# Altium PCB Fuente_Alimentacion.PcbDoc
Units mm, origin at the board's own origin, x right, y up, seen from the top; angles counter-clockwise.
Board outline 62.23 x 53.34 mm, 2 copper layers (Top Layer, Bottom Layer); 45 components, 16 nets, 122 pads, 39 vias.
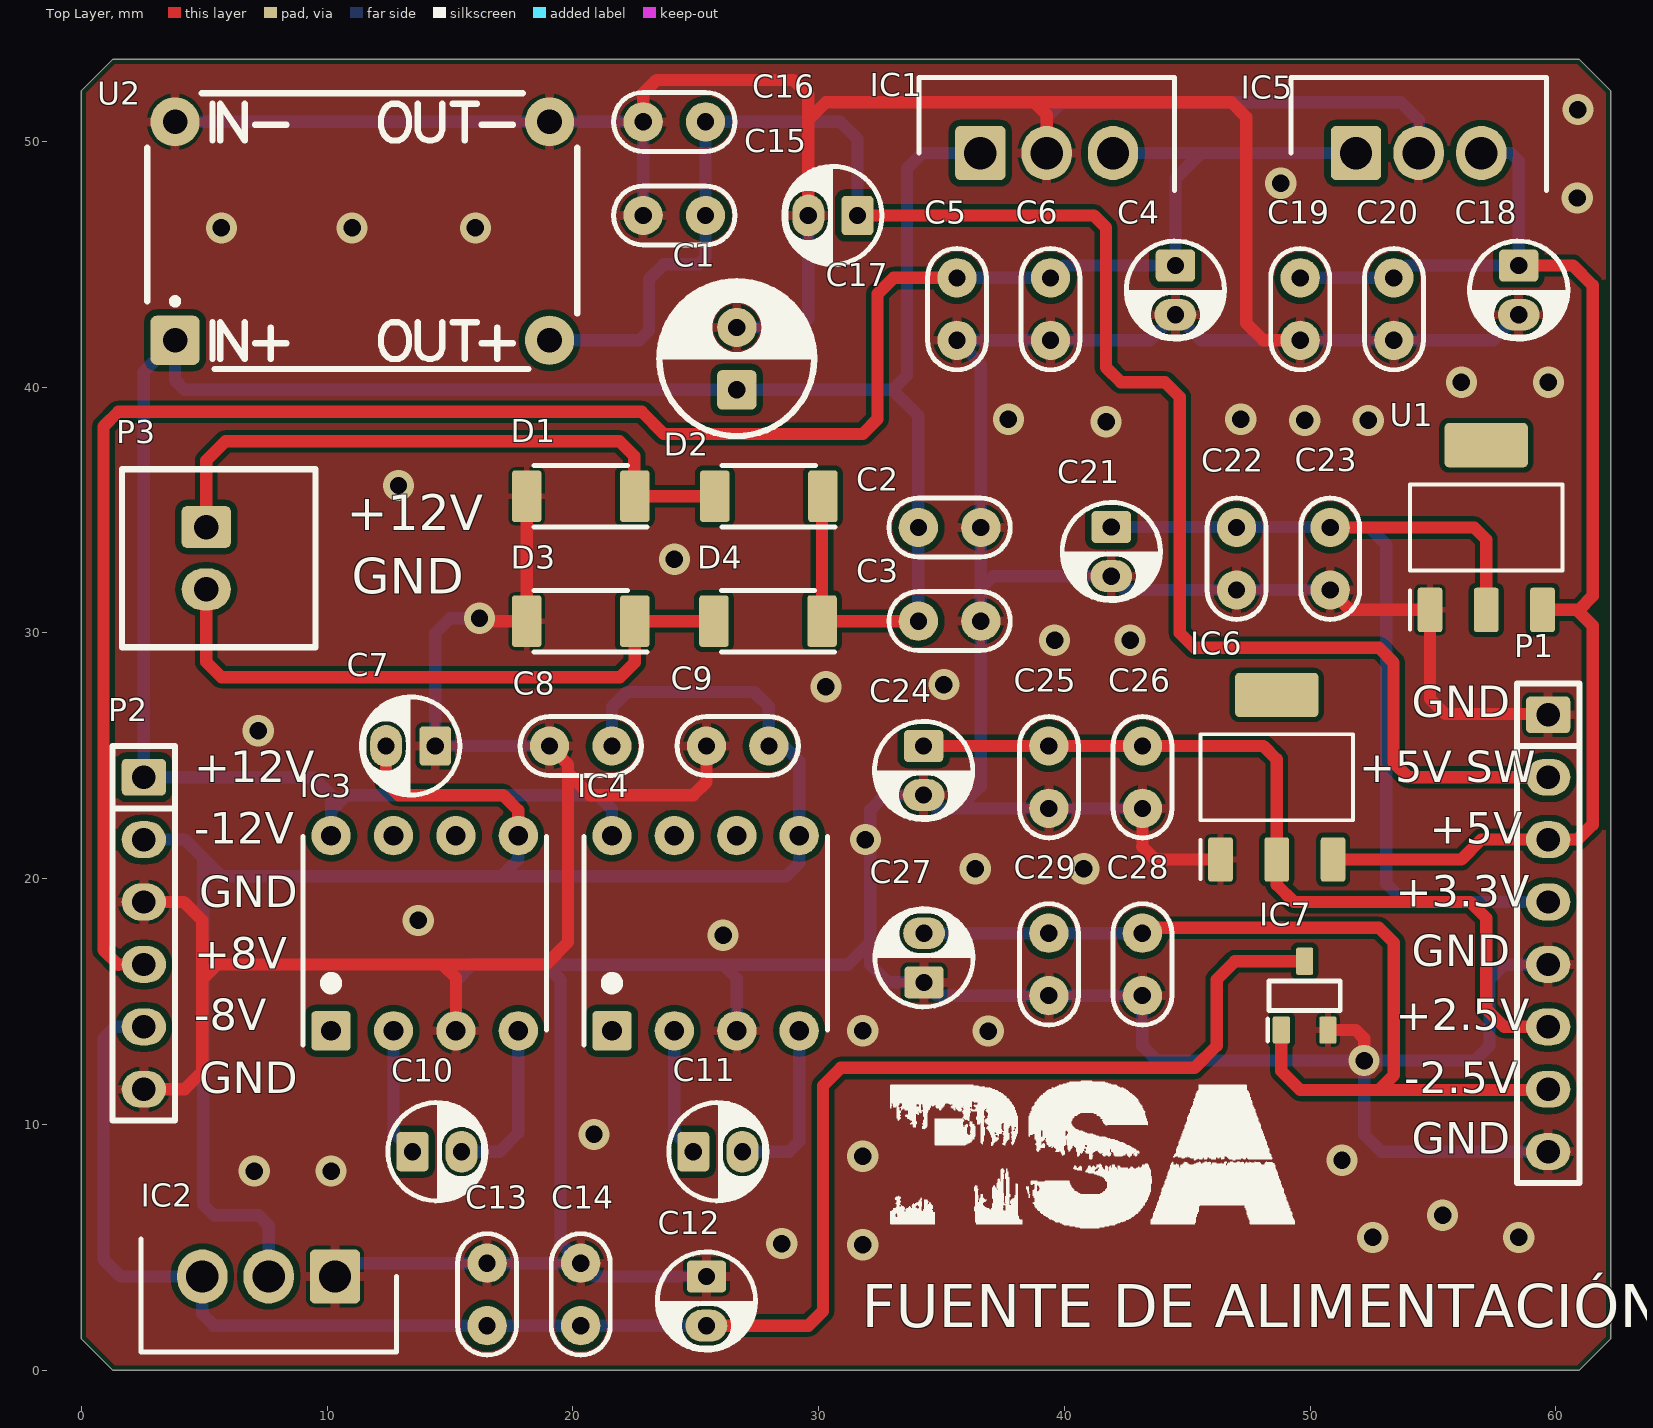
[diagram p0: Top Layer view]
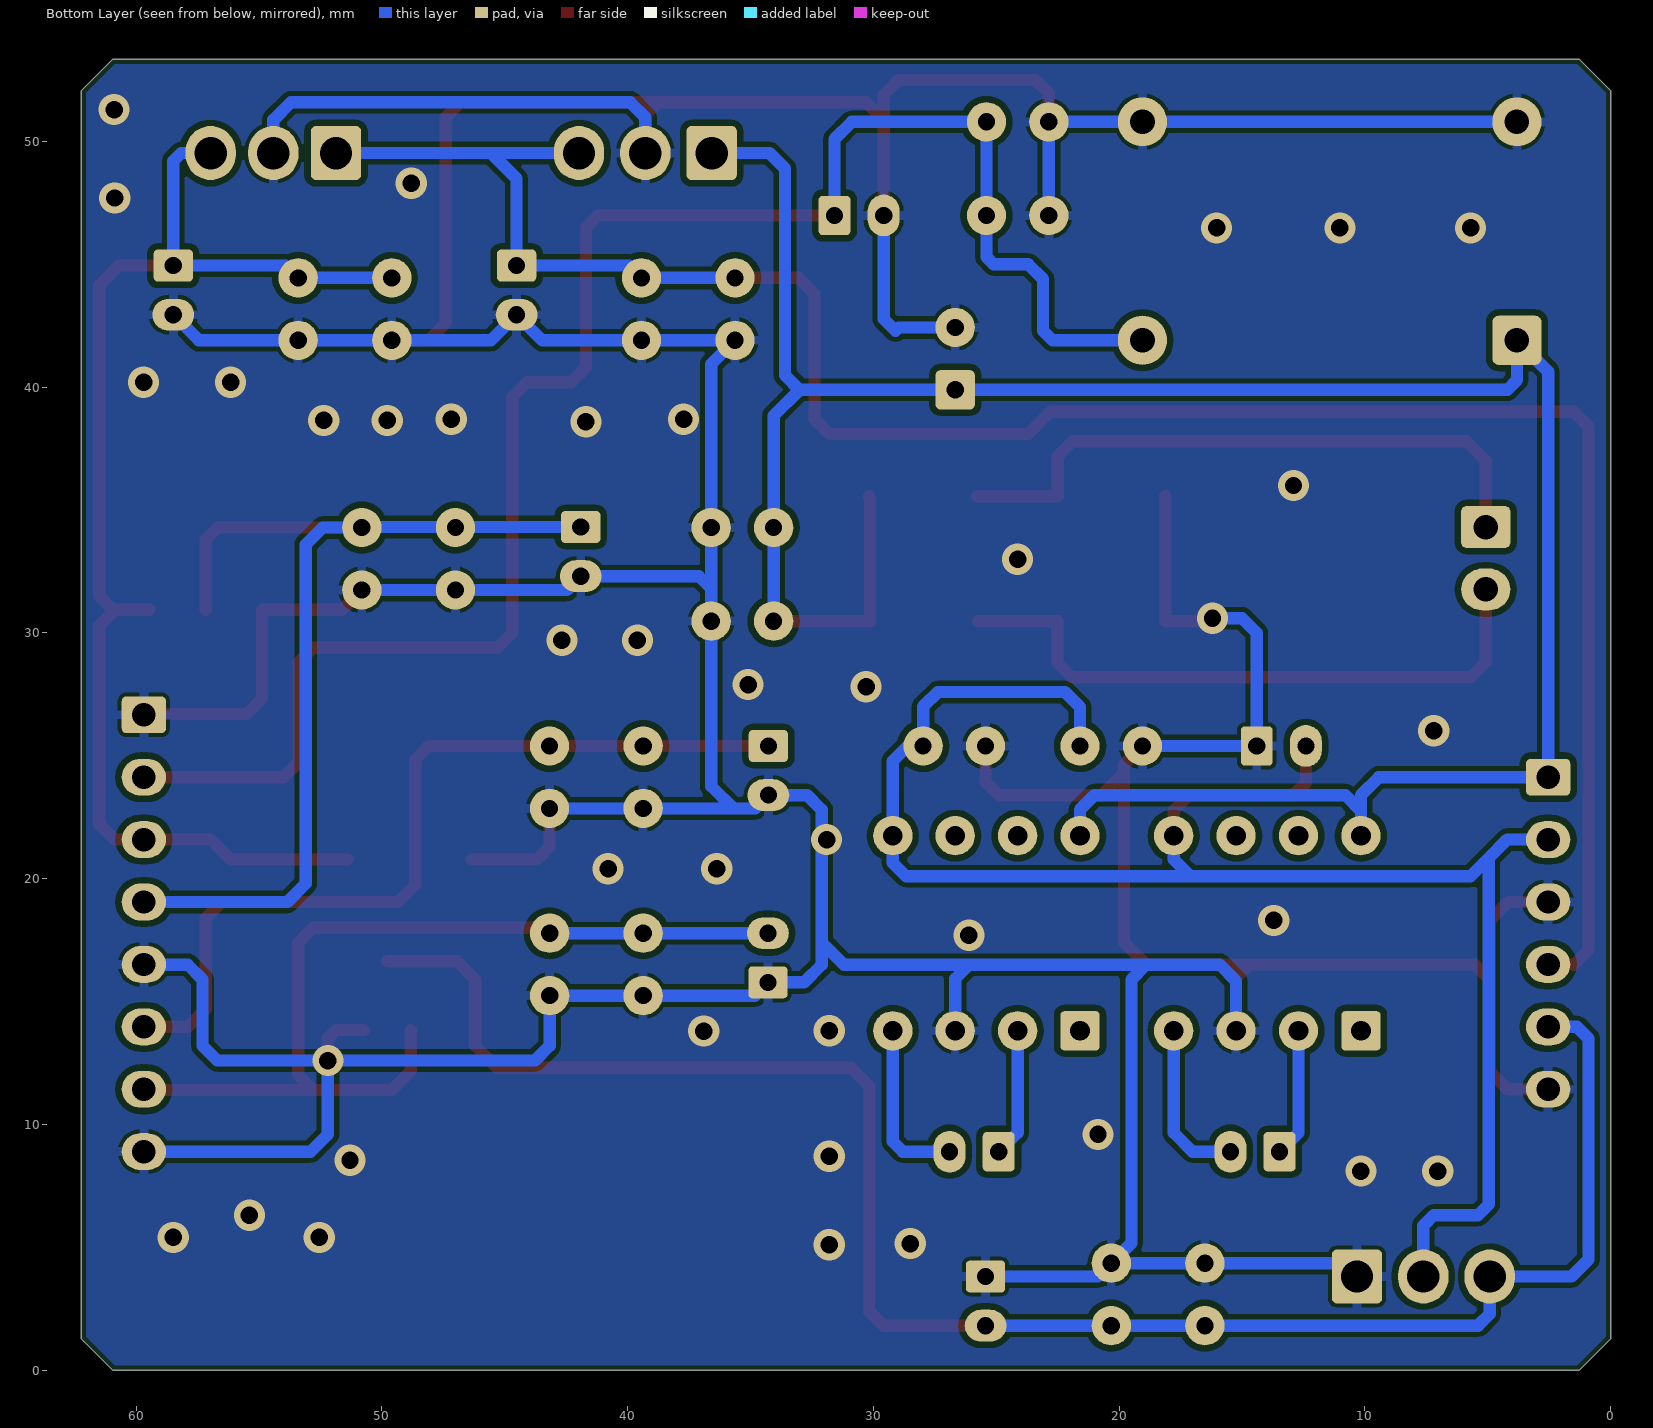
[diagram p1: Bottom Layer view, seen from below]
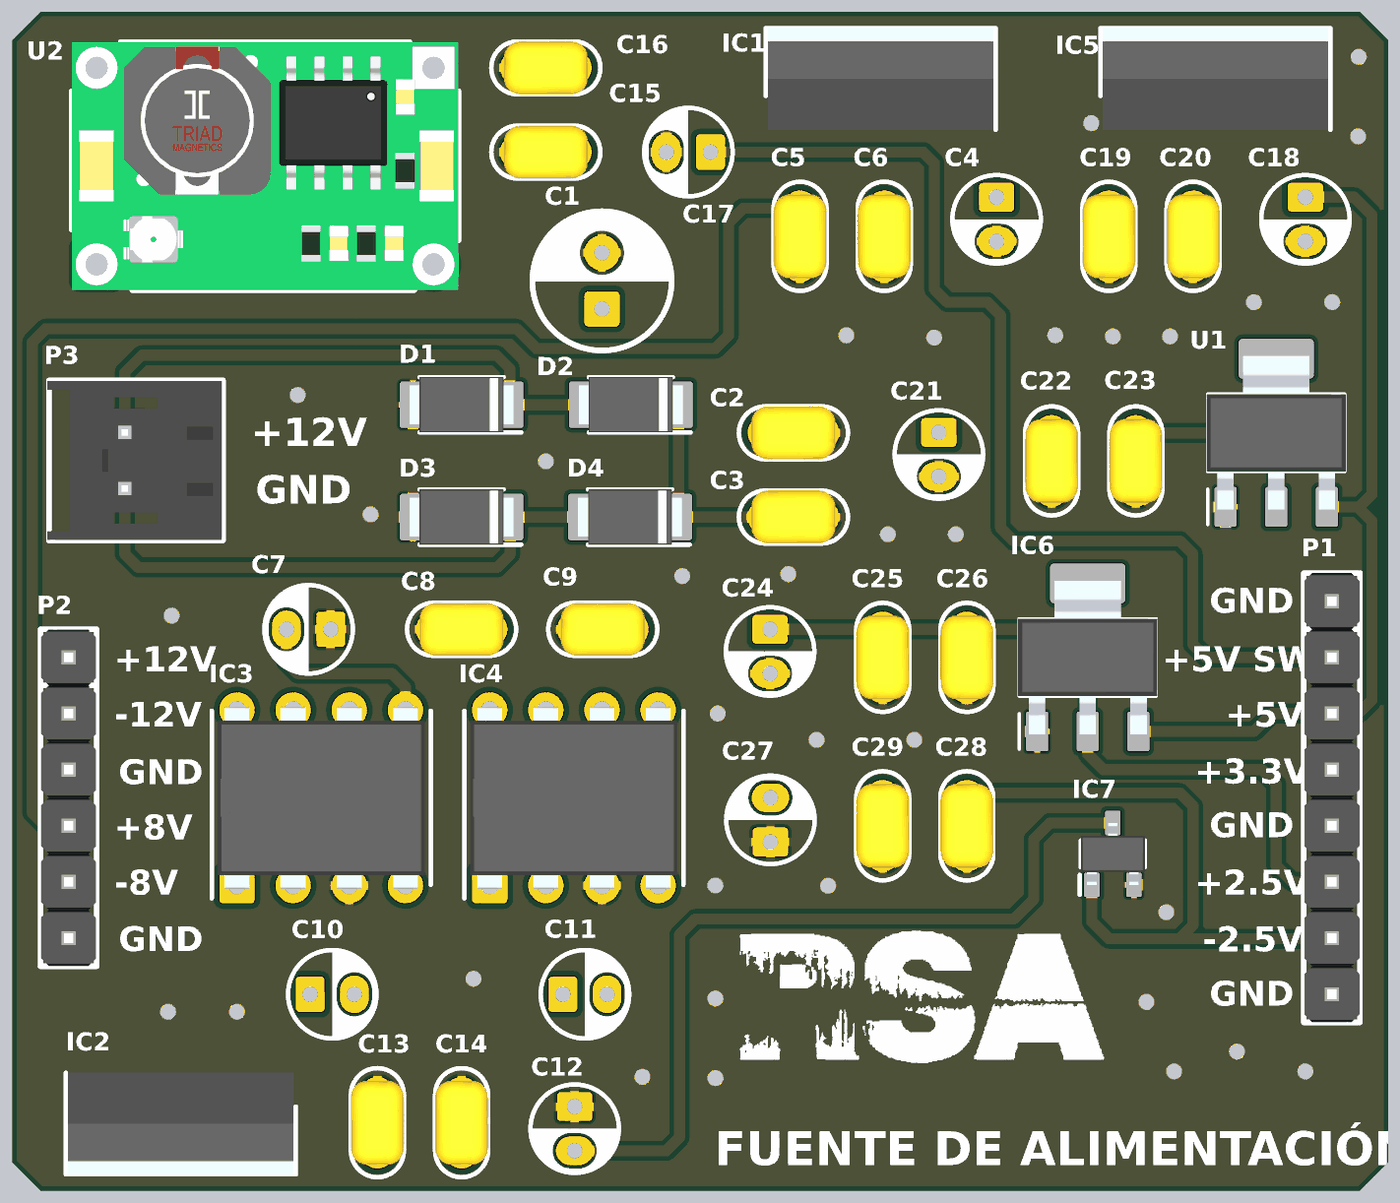
[diagram p2: 3D render of the assembled board from above, using the file's embedded part models]

## Layer stack, top to bottom
Top Solder: solder mask 0.0102, Solder Resist, Dk 3.5
Top Layer: signal copper 0.0356
Dielectric 1: dielectric 0.32, FR-4, Dk 4.8
Bottom Layer: signal copper 0.0356
Bottom Solder: solder mask 0.0102, Solder Resist, Dk 3.5

## Board outline
0,1.27 1.27,0 60.96,0 62.23,1.27 62.23,52.07 60.96,53.34 1.27,53.34 0,52.07

## Design rules (kind name [scope] priority, off if disabled: settings)
BoardOutlineClearance [All] p1: gap=0.2 ignorepadtopadclearanceinfootprint=FALSE except(0.4: Arc-SplitBarrior Arc-SplitContinuation Track-SplitBarrior Track-SplitContinuation SMDPad-SplitBarrior SMDPad-SplitContinuation THPad-SplitBarrior THPad-SplitContinuation Via-SplitBarrior Via-SplitContinuation Fill-SplitBarrior Fill-SplitContinuation Poly-SplitBarrior Poly-SplitContinuation Region-SplitBarrior Region-SplitContinuation Text-SplitBarrior Text-SplitContinuation)
Clearance Clearance_MOUSE_BITES [IsPad And (HoleDiameter > 0) And InPadClass('MOUSE_BITES')] p1: gap=0.254 ignorepadtopadclearanceinfootprint=TRUE
Clearance Clearance_KO [OnLayer('Keep-Out Layer')] p2: gap=0.3 ignorepadtopadclearanceinfootprint=TRUE
Clearance Clearance_THPAD [IsPad  And (HoleDiameter > 0) And (Not InPadClass('FIX')) And (PadIsPlated = 'True')] p3: gap=0.254 ignorepadtopadclearanceinfootprint=TRUE except(0.089: Arc-Arc Arc-Track Arc-SMDPad Track-Track Track-SMDPad SMDPad-SMDPad; 0.127: Arc-Via Track-Via SMDPad-Via THPad-Via Via-Via; 0.15: Arc-Text Track-Text SMDPad-Text THPad-Text Via-Text Fill-Text Poly-Text Region-Text Text-Text; 0.2: Arc-THPad Arc-Hole Track-THPad Track-Hole SMDPad-THPad SMDPad-Hole THPad-THPad THPad-Hole Via-Hole Fill-Hole Poly-Hole Region-Hole Text-Hole)
Clearance Clearance_FIX [IsPad And InPadClass('FIX')] p4: gap=0.381 ignorepadtopadclearanceinfootprint=TRUE
Clearance Clearance_VIA [All vs IsVia] p5: gap=0.2 ignorepadtopadclearanceinfootprint=TRUE except(0.089: Arc-Arc Arc-Track Arc-SMDPad Track-Track Track-SMDPad SMDPad-SMDPad; 0.127: Arc-Via Track-Via SMDPad-Via THPad-Via Via-Via; 0.15: Arc-Text Track-Text SMDPad-Text THPad-Text Via-Text Fill-Text Poly-Text Region-Text Text-Text; 0.254: Arc-Hole Track-Hole SMDPad-Hole THPad-Hole Via-Hole Fill-Hole Poly-Hole Region-Hole Text-Hole)
Clearance Clearance_PTH [IsPad And (HoleDiameter > 0) And (PadIsPlated = 'True')] p6: gap=0.2 ignorepadtopadclearanceinfootprint=TRUE except(0.089: Arc-Arc Arc-Track Arc-SMDPad Track-Track Track-SMDPad SMDPad-SMDPad; 0.127: Arc-Via Track-Via SMDPad-Via THPad-Via Via-Via; 0.15: Arc-Text Track-Text SMDPad-Text THPad-Text Via-Text Fill-Text Poly-Text Region-Text Text-Text; 0.33: Arc-Hole Track-Hole SMDPad-Hole THPad-Hole Via-Hole Fill-Hole Poly-Hole Region-Hole Text-Hole)
Clearance Clearance_NPTH [IsPad And (HoleDiameter > 0) And (PadIsPlated = 'False')] p7: gap=0.2 ignorepadtopadclearanceinfootprint=TRUE except(0.089: Arc-Arc Arc-Track Arc-SMDPad Track-Track Track-SMDPad SMDPad-SMDPad; 0.127: Arc-Via Track-Via SMDPad-Via THPad-Via Via-Via; 0.15: Arc-Text Track-Text SMDPad-Text THPad-Text Via-Text Fill-Text Poly-Text Region-Text Text-Text; 0.254: Arc-Hole Track-Hole SMDPad-Hole THPad-Hole Via-Hole Fill-Hole Poly-Hole Region-Hole Text-Hole)
Clearance Clearance_GENERAL_GROUND [InPolygonClass('GENERAL_GROUND') vs OnLayer('Bottom Layer') or OnLayer('Top Layer')] p8: gap=0.2 ignorepadtopadclearanceinfootprint=TRUE except(0.127: Arc-Arc Arc-Track Arc-SMDPad Track-Track Track-SMDPad SMDPad-SMDPad; 0.15: Arc-Text Track-Text SMDPad-Text THPad-Text Via-Text Fill-Fill Fill-Poly Fill-Region Fill-Text Poly-Poly Poly-Region Poly-Text Region-Region Region-Text Text-Text)
Clearance Clearance_BL [OnLayer('Bottom Layer')] p9: gap=0.254 ignorepadtopadclearanceinfootprint=TRUE except(0.127: Arc-Arc Arc-Track Arc-SMDPad Track-Track Track-SMDPad SMDPad-SMDPad; 0.15: Arc-Text Track-Text SMDPad-Text THPad-Text Via-Text Fill-Text Poly-Text Region-Text Text-Text; 0.2: Arc-THPad Arc-Via Arc-Hole Track-THPad Track-Via Track-Hole SMDPad-THPad SMDPad-Via SMDPad-Hole THPad-THPad THPad-Via THPad-Hole Via-Via Via-Hole Fill-Hole Poly-Hole Region-Hole Text-Hole)
Clearance Clearance_TL [OnLayer('Top Layer')] p10: gap=0.254 ignorepadtopadclearanceinfootprint=TRUE except(0.127: Arc-Arc Arc-Track Arc-SMDPad Track-Track Track-SMDPad SMDPad-SMDPad; 0.15: Arc-Text Track-Text SMDPad-Text THPad-Text Via-Text Fill-Text Poly-Text Region-Text Text-Text; 0.2: Arc-THPad Arc-Via Arc-Hole Track-THPad Track-Via Track-Hole SMDPad-THPad SMDPad-Via SMDPad-Hole THPad-THPad THPad-Via THPad-Hole Via-Via Via-Hole Fill-Hole Poly-Hole Region-Hole Text-Hole)
Clearance [All] p11: gap=0.127 ignorepadtopadclearanceinfootprint=FALSE except(0.089: Arc-Arc Arc-Track Arc-SMDPad Track-Track Track-SMDPad SMDPad-SMDPad; 0.15: Arc-Text Track-Text SMDPad-Text THPad-Text Via-Text Fill-Text Poly-Text Region-Text Text-Text; 0.2: Arc-THPad Arc-Hole Track-THPad Track-Hole SMDPad-THPad SMDPad-Hole THPad-THPad THPad-Hole Via-Hole Fill-Hole Poly-Hole Region-Hole Text-Hole)
DiffPairsRouting [All] p1: maxlimit=0.254 minlimit=0.127 mostfreqgap=0.2 toplayer_minwidth=0.127 toplayer_maxwidth=0.381 toplayer_prefwidth=0.254 bottomlayer_minwidth=0.127 bottomlayer_maxwidth=0.381 bottomlayer_prefwidth=0.254 maxuncoupledlength=12.7
HoleSize SlotSize_NPTH [IsPad And (HoleDiameter > 0) And (HoleType = 'Slot') And (PadIsPlated = 'False')] p1: absolutevalues=TRUE maxlimit=6.35 minlimit=1 maxpercent=80.000 minpercent=20.000
HoleSize SlotSize_PTH [IsPad And (HoleDiameter > 0) And (HoleType = 'Slot') And (PadIsPlated = 'True')] p2: absolutevalues=TRUE maxlimit=6.35 minlimit=0.65 maxpercent=80.000 minpercent=20.000
HoleSize HoleSize_NPTH [IsPad And (HoleDiameter > 0) And (PadIsPlated = 'False')] p3: absolutevalues=TRUE maxlimit=6.35 minlimit=0.5 maxpercent=80.000 minpercent=20.000
HoleSize HoleSize_PTH [IsPad And (HoleDiameter > 0) And (PadIsPlated = 'True')] p4: absolutevalues=TRUE maxlimit=6.35 minlimit=0.2 maxpercent=80.000 minpercent=20.000
HoleSize [All] p5: absolutevalues=TRUE maxlimit=6.3 minlimit=0.2 maxpercent=80.000 minpercent=20.000
HoleToHoleClearance HoleToHoleClearance_MOUSE_BITES [IsPad And (HoleDiameter > 0) And InPadClass('MOUSE_BITES')] p1: gap=0.254 allowstackedmicrovias=TRUE
HoleToHoleClearance HoleToHoleClearance_VIA [IsVia And (HoleDiameter > 0)] p2: gap=0.508 allowstackedmicrovias=TRUE
HoleToHoleClearance HoleToHoleClearance_PAD [IsPad And (HoleDiameter > 0)] p3: gap=0.508 allowstackedmicrovias=TRUE
HoleToHoleClearance [All] p4: gap=0.254 allowstackedmicrovias=TRUE
MinimumAnnularRing [All] p1: minimumring=0.076
MinimumSolderMaskSliver MinimumSolderMaskSliver_MOUSE_BITES [IsPad And (HoleDiameter > 0) And InPadClass('MOUSE_BITES')] p1: minsoldermaskwidth=0
MinimumSolderMaskSliver [All] p2: minsoldermaskwidth=0.1
PlaneClearance PlaneClearance_NPTH [(HoleDiameter > 0) And (PadIsPlated = 'False')] p1: clearance=0.254
PlaneClearance [All] p2: clearance=0.508
PlaneConnect [All] p1: pad.planeconnectstyle=Relief pad.reliefexpansion=0.508 pad.reliefentries=4 pad.reliefconductorwidth=0.254 pad.reliefairgap=0.254 via.planeconnectstyle=Relief via.reliefexpansion=0.508 via.reliefentries=4 via.reliefconductorwidth=0.254 via.reliefairgap=0.127
PolygonConnect PolygonConnect_Direct [InPolygonClass('CONNECT_DIRECT')] p1: connectstyle=Direct reliefconductorwidth=0.254 reliefentries=4 polygonreliefangle="90 Angle" airgapwidth=0.254
PolygonConnect [All] p2: thpad.connectstyle=Relief thpad.reliefconductorwidth=0.381 thpad.reliefentries=4 thpad.polygonreliefangle="90 Angle" thpad.airgapwidth=0.15 smdpad.connectstyle=Relief smdpad.reliefconductorwidth=0.254 smdpad.reliefentries=4 smdpad.polygonreliefangle="90 Angle" smdpad.airgapwidth=0.127 via.connectstyle=Direct via.reliefconductorwidth=0.254 via.reliefentries=4 via.polygonreliefangle="90 Angle" via.airgapwidth=0.127
RoutingVias [All] p1: holewidth=0.5 width=1 viastyle="Through Hole" minholewidth=0.2 minwidth=0.45 maxholewidth=1 maxwidth=2
SilkToSilkClearance [All] p1: silktosilkclearance=0.1
SilkToSolderMaskClearance [IsPad] p1: minsilkscreentomaskgap=0.1 clearancetoexposedcopper=TRUE
SolderMaskExpansion SolderMaskExpansion_NPTH [IsPad And (HoleDiameter > 0) And (PadIsPlated = 'False')] p1: expansion=0.127
SolderMaskExpansion [All] p2: expansion=0.05
UnRoutedNet [All] p1: checkbadconnections=TRUE
Width Width_SILK [OnLayer('Top Overlay') Or OnLayer('Bottom Overlay')] p1: maxlimit=2.54 minlimit=0.15 preferedwidth=0.254
Width Width_POWER [All] p2: maxlimit=2.54 minlimit=0.127 preferedwidth=0.3 minimp=50.000000 maximp=50.000000 favimp=50.000000
Width [All] p3: maxlimit=2.54 minlimit=0.089 preferedwidth=0.25 minimp=50.000000 maximp=50.000000 favimp=50.000000
21 further rules are at their usual default settings.

## Classes and differential pairs
polygon class GENERAL_GROUND: PLANO_BOTTOM PLANO_TOP

## Components (designator, comment, footprint, x,y, rotation, side; value= is the part's Value field where it differs from the comment)
C1 "CAP_POL 220uF" CAP-2.5-6.3MM 26.67,42.433 r270 top
C2 "CAP 100nF" RADIAL-0.1 34.06,34.29 r0 top
C3 "CAP 10nF" RADIAL-0.1 34.06,30.48 r0 top
C4 "CAP_POL 100uF" CAP-2.0-5.0MM 44.52,42.95 r90 top
C5 "CAP 100nF" RADIAL-0.1 35.63,44.45 r270 top
C6 "CAP 10nF" RADIAL-0.1 39.44,44.45 r270 top
C7 "CAP_POL 100uF" CAP-2.0-5.0MM 12.399,25.4 r0 top
C8 "CAP 100nF" RADIAL-0.1 21.59,25.4 r180 top
C9 "CAP 10nF" RADIAL-0.1 27.975,25.4 r180 top
C10 "CAP_POL 47uF" CAP-2.0-5.0MM 15.47,8.89 r180 top
C11 "CAP_POL 47uF" CAP-2.0-5.0MM 26.9,8.89 r180 top
C12 "CAP_POL 100uF" CAP-2.0-5.0MM 25.436,1.81 r90 top
C13 "CAP 100nF" RADIAL-0.1 16.51,1.81 r90 top
C14 "CAP 10nF" RADIAL-0.1 20.32,1.81 r90 top
C15 "CAP_POL 100uF" CAP-2.0-5.0MM 29.58,46.99 r0 top
C16 "CAP 100nF" RADIAL-0.1 25.4,50.8 r180 top
C17 "CAP 10nF" RADIAL-0.1 25.4,46.99 r180 top
C18 "CAP_POL 100uF" CAP-2.0-5.0MM 58.49,42.95 r90 top
C19 "CAP 100nF" RADIAL-0.1 49.6,44.45 r270 top
C20 "CAP 10nF" RADIAL-0.1 53.41,44.45 r270 top
C21 "CAP_POL 100uF" CAP-2.0-5.0MM 41.91,32.31 r90 top
C22 "CAP 100nF" RADIAL-0.1 47.01,34.29 r270 top
C23 "CAP 10nF" RADIAL-0.1 50.82,34.29 r270 top
C24 "CAP_POL 100uF" CAP-2.0-5.0MM 34.274,23.4 r90 top
C25 "CAP 100nF" RADIAL-0.1 39.37,25.4 r270 top
C26 "CAP 10nF" RADIAL-0.1 43.18,25.4 r270 top
C27 "CAP_POL 100uF" CAP-2.0-5.0MM 34.29,17.78 r270 top
C28 "CAP 100nF" RADIAL-0.1 43.175,17.78 r270 top
C29 "CAP 10nF" RADIAL-0.1 39.37,17.78 r270 top
D1 "PMEG3020EP,115" SODFL4725X110N 20.32,35.56 r180 top value="30V 2A 360mV"
D2 "PMEG3020EP,115" SODFL4725X110N 27.976,35.56 r180 top value="30V 2A 360mV"
D3 "PMEG3020EP,115" SODFL4725X110N 20.32,30.48 r180 top value="30V 2A 360mV"
D4 "PMEG3020EP,115" SODFL4725X110N 27.94,30.48 r180 top value="30V 2A 360mV"
IC1 "L7808CV" TO270P460X1020X2008-3P 36.58,49.53 r0 top
IC2 "L7908CV" TO270P460X1020X2008-3P 10.32,3.81 r180 top
IC3 "ICL7662CPA+" DIP794W56P254L938H457Q8N 13.97,17.78 r90 top
IC4 "ICL7662CPA+" DIP794W56P254L938H457Q8N 25.4,17.78 r90 top
IC5 "L7805CV" TO255P460X1020X2008-3P 51.87,49.53 r0 top
IC6 "AMS1117-2.5" SOT229P700X180-4N 48.645,24.13 r270 top
IC7 "XC6902N251MR-G" SOT95P280X130-3N 49.78,15.24 r90 top
P1 "PEINETA-8X1P" SIP-8X1P-M-V 59.69,26.67 r270 top
P2 "PEINETA-6X1P" SIP-6X1P-M-V 2.54,24.13 r270 top
P3 "MOLEX-ENTRADA-+/-12V" MOLEX-2P 5.08,34.31 r180 top
U1 "AMS1117-3.3" SOT229P700X180-4N 57.17,34.29 r270 top
U2 "360-MINI-SD" 360-MINI-SD-v1 3.81,41.91 r0 top

## Footprints (in the part's own frame and the unit in brackets; to place one, negate y for a bottom-side part, rotate by r counter-clockwise, add the part's x,y. Pads: shape width x height; smd on the part's side, far side on the other; paste and mask are expansions set on the pad)
360-MINI-SD-v1 [mm] "REGULADORES"
  rrect25% 2x2 hole 1: 1(0,0)
  round 2 hole 1: 2(0,8.89) 3(15.24,0) 4(15.24,8.89)
  silkscreen extent -1.13,-1.16 16.37,10.05, body extent -1.13,-1.16 16.37,10.06, height 3.84
CAP-2.0-5.0MM [mm] "RADIAL"
  rrect25% 1.3x1.6 hole 0.7: 1(2,0)
  oval 1.3x1.7 hole 0.7: 2(0,0)
  silkscreen extent -1,-2 3,2
CAP-2.5-6.3MM [mm] "RADIAL"
  rrect25% 1.6x1.6 hole 0.7: 1(2.54,0)
  round 1.6 hole 0.7: 2(0,0)
  silkscreen extent -1.88,-3.15 4.42,3.15
DIP794W56P254L938H457Q8N [mm] "DIP"
  rrect20% 1.6x1.6 hole 0.8: 1(-3.97,3.81)
  round 1.6 hole 0.8: 2(-3.97,1.27) 3(-3.97,-1.27) 4(-3.97,-3.81) 5(3.97,-3.81) 6(3.97,-1.27) 7(3.97,1.27) 8(3.97,3.81)
  silkscreen extent -4.55,-4.95 3.94,4.95, body extent -4.11,-4.69 4.11,4.69, height 4.57
MOLEX-2P [mm] "CONECTORES"
  rrect25% 2x1.7 hole 1: 1(0,0)
  oval 2x1.7 hole 1: 2(0,2.54)
  silkscreen extent -4.45,-2.35 3.43,4.89, body extent -4.4,-2.34 3.5,4.88, height 10.4
RADIAL-0.1 [mm] "RADIAL"
  round 1.6 hole 0.7: 1(0,0) 2(2.54,0)
  silkscreen extent -1.2,-1.2 3.74,1.2, body extent -0.63,-1.2 3.17,1.2, height 4.14
SIP-6X1P-M-V [mm] "PEINETA"
  rrect25% 1.5x1.8 hole 0.95: 1(0,0)
  oval 1.5x1.8 hole 0.95: 2(2.54,0) 3(5.08,0) 4(7.62,0) 5(10.16,0) 6(12.7,0)
  silkscreen extent -1.27,-1.27 13.97,1.27, body extent -1.27,-1.25 13.97,1.25, height 8.5
SIP-8X1P-M-V [mm] "PEINETA"
  rrect25% 1.5x1.8 hole 0.95: 1(0,0)
  oval 1.5x1.8 hole 0.95: 2(2.54,0) 3(5.08,0) 4(7.62,0) 5(10.16,0) 6(12.7,0) 7(15.24,0) 8(17.78,0)
  silkscreen extent -1.27,-1.27 19.05,1.27, body extent -1.27,-1.25 19.05,1.25, height 8.55
SODFL4725X110N [mm]
  rrect20% 1.2x2.1 smd: 1(-2.2,0) 2(2.2,0)
  silkscreen extent -2.7,-1.25 1.9,1.25, body extent -2.35,-1.25 2.35,1.25, height 1.1
SOT95P280X130-3N [mm]
  rrect20% 1.1x0.7 smd: 1(-1.4,0.95) 2(-1.4,-0.95) 3(1.4,0)
  silkscreen extent -1.85,-1.45 0.6,1.5, body extent -1.4,-1.45 1.4,1.45, height 1.3
SOT229P700X180-4N [mm]
  rrect20% 1.8x1 smd: 1(3.35,-2.29) 2(3.35,0) 3(3.35,2.29)
  rrect20% 1.8x3.4 smd: 4(-3.35,0)
  silkscreen extent -1.75,-3.1 4.15,3.1, body extent -3.47,-3.15 3.47,3.15, height 1.8
TO255P460X1020X2008-3P [mm]
  rrect20% 2.05x2.2 hole 1.32: 1(0,0)
  oval 2.05x2.2 hole 1.32: 2(2.55,0) 3(5.1,0)
  silkscreen extent -2.65,-1.53 7.75,3.07, body extent -2.55,-1.53 7.65,3.07, height 19.22
TO270P460X1020X2008-3P [mm]
  rrect20% 2.05x2.2 hole 1.32: 1(0,0)
  oval 2.05x2.2 hole 1.32: 2(2.7,0) 3(5.4,0)
  silkscreen extent -2.5,-1.53 7.9,3.07, body extent -2.4,-1.53 7.8,3.07, height 19.22

## Part data
C1 C4 C7 C10 C11 C12 C15 C18 C21 C24 C27: library part CAP_POL, "Basicos"
C2 C3 C5 C6 C8 C9 C13 C14 C16 C17 C19 C20 C22 C23 C25 C26 C28 C29: library part CAP, "Basicos"
D1 D2 D3 D4: "Diode", JLCPCB Basic=No, JLCPCB Part #=C513108, Manufacturer_Name=Nexperia, Mouser Part Number=771-PMEG3020EP115, Package=SOD-128, Arrow Part Number=PMEG3020EP,115, Arrow Price/Stock=https://www.arrow.com/en/products/pmeg3020ep115/nexperia?region=nac, Datasheet Link=https://componentsearchengine.com/Datasheets/2/PMEG3020EP,115.pdf, Height=1.1mm, Info="30V 2A 360mV @ 2A SOD-128 Schottky Barrier Diodes (SBD) ROHS", JLCPCB Price=0.1911, Manufacturer_Part_Number=PMEG3020EP,115, Mouser Price/Stock=https://www.mouser.co.uk/ProductDetail/Nexperia/PMEG3020EP115?qs=GcY6OjH1zdnlY%252B06tUqEyw%3D%3D
IC1: "Integrated Circuit", JLCPCB Basic=No, JLCPCB Part #=C519076, Manufacturer_Name=STMicroelectronics, Mouser Part Number=511-L7808CV, Package=TO-220-3, Arrow Part Number=L7808CV, Arrow Price/Stock=https://www.arrow.com/en/products/l7808cv/stmicroelectronics, Datasheet Link=http://www.st.com/web/en/resource/technical/document/datasheet/CD00000444.pdf, Height=4.6mm, Info="TO-220-3 Linear Voltage Regulators (LDO) ROHS", JLCPCB Price=0.2029, Manufacturer_Part_Number=L7808CV, Mouser Price/Stock=https://www.mouser.co.uk/ProductDetail/STMicroelectronics/L7808CV?qs=ewe0KQ%2FSs5GFsjTXbJ%252ByYA%3D%3D
IC2: "Integrated Circuit", JLCPCB Basic=No, JLCPCB Part #=C26162, Manufacturer_Name=STMicroelectronics, Mouser Part Number=511-L7908CV, Package=TO-220,TO-220-3, Arrow Part Number=L7908CV, Arrow Price/Stock=https://www.arrow.com/en/products/l7908cv/stmicroelectronics, Datasheet Link=http://www.st.com/web/en/resource/technical/document/datasheet/CD00000450.pdf, Height=4.6mm, Info="1.1V @ 1A(typ) - - Fixed -35V -8V TO-220(TO-220-3) Linear Voltage Regulators (LDO) ROHS", JLCPCB Price=0.4063, Manufacturer_Part_Number=L7908CV, Mouser Price/Stock=https://www.mouser.co.uk/ProductDetail/STMicroelectronics/L7908CV?qs=W%252B4obUA0F3a1iCcgpeCvfA%3D%3D
IC3 IC4: "Integrated Circuit", JLCPCB Basic=No, JLCPCB Part #=C14340, Manufacturer_Name="Maxim Integrated", Mouser Part Number=700-ICL7662CPA, Package=DIP-8, Datasheet Link=https://datasheet.datasheetarchive.com/originals/distributors/Datasheets-18/DSA-345107.pdf, Height=4.572mm, Info="20V - DIP-8 DC-DC Converters ROHS", JLCPCB Price=2.6457, Manufacturer_Part_Number=ICL7662CPA+, Mouser Price/Stock=https://www.mouser.co.uk/ProductDetail/Maxim-Integrated/ICL7662CPA%2b?qs=0Y9aZN%252BMVCV5CIR47Klr4Q%3D%3D
IC5: "Integrated Circuit", JLCPCB Basic=No, JLCPCB Part #=C111887, Manufacturer_Name=STMicroelectronics, Mouser Part Number=511-L7805CV, Package=TO-220,TO-220-3, Arrow Part Number=L7805CV, Arrow Price/Stock=https://www.arrow.com/en/products/l7805cv/stmicroelectronics, Datasheet Link=http://www.st.com/web/en/resource/technical/document/datasheet/CD00000444.pdf, Height=4.6mm, Info="35V 2V @ 1A(typ) - - Fixed 5V TO-220(TO-220-3) Linear Voltage Regulators (LDO) ROHS", JLCPCB Price=0.2153, Manufacturer_Part_Number=L7805CV, Mouser Price/Stock=https://www.mouser.co.uk/ProductDetail/STMicroelectronics/L7805CV?qs=9NrABl3fj%2FqplZAHiYUxWg%3D%3D
IC6: "Integrated Circuit", JLCPCB Basic=No, JLCPCB Part #=C12087, Manufacturer_Name="Advanced Monolithic Systems", Package=SOT-223, Datasheet Link=https://datasheet.lcsc.com/szlcsc/Advanced-Monolithic-Systems-AMS-AMS1117-2-5_C12087.pdf, Height=1.8mm, Info="15V 1.3V @ 1A - - Fixed 2.5V SOT-223 Linear Voltage Regulators (LDO) ROHS", JLCPCB Price=0.1709, Manufacturer_Part_Number=AMS1117-2.5
IC7: "Integrated Circuit", Manufacturer_Name=Torex, Mouser Part Number=865-XC6902N251MR-G, Package=SOT-23, Datasheet Link=http://www.mouser.com/ds/2/760/XC6902-846637.pdf, Height=1.3mm, Info="Fixed -2.5V Linear Voltage Regulators (LDO) ROHS", Manufacturer_Part_Number=XC6902N251MR-G, Mouser Price/Stock=https://www.mouser.co.uk/ProductDetail/Torex-Semiconductor/XC6902N251MR-G/?qs=AsjdqWjXhJ97TLkuQPXWBQ%3D%3D
P1 P2: "Conector"
P3: library part MOLEX-2P, "Conector"
U1: "Integrated Circuit", JLCPCB Part #=C6186, Manufacturer_Name="Advanced Monolithic Systems", Package=SOT-223-3, Datasheet Link=http://www.advanced-monolithic.com/pdf/ds1117.pdf, Height=1.8mm, Info="15V 1.3V @ 800mA - - Fixed 3.3V SOT-223 Linear Voltage Regulators (LDO) ROHS", JLCPCB Price=0.1605, Manufacturer_Part_Number=AMS1117-3.3
U2: "Basicos"

## Via types
v1: diameter 1.27, hole 0.711, Top Layer to Bottom Layer, tented both sides, 39 vias

## Nets (pads, with @x,y where several pads share a name; then routed paths per layer and width w, separated by ;. In a path a pad name is that pad's centre, name@x,y a point inside that pad or via, vN(x,y) a via of type N, cw(c..) or ccw(c..) an arc to the next point about the centre after c; other vN are vias at no path point)
+2.5V: C24.1 C25.1 C26.1 IC6.2 P1.6 | length 35.3
  Top Layer w0.5: C24.1 C25.1 C26.1 48.1,25.4 48.645,24.855 48.645,19.755 49.35,19.05 56.52,19.05 57.17,18.4 57.17,14.7 57.9,13.97 P1.6
+3.3V: C21.1 C22.1 C23.1 P1.4 U1.2 | length 41.6
  Top Layer w0.5: C23.1 56.68,34.29 57.17,33.8 U1.2
  Bottom Layer w0.5: C21.1 50.8,34.31 C23.1 52.41,34.29 53.1,33.6 53.1,19.8 53.85,19.05 P1.4
+5V: C18.1 C19.1 C20.1 IC5.3 IC6.3 P1.3 U1.3 | length 53
  Top Layer w0.5: IC6.3@51.395,20.78 56.16,20.78 56.97,21.59 P1.3 60.89,21.59 61.5,22.2 61.5,30.3 60.86,30.94 ; C18.1 60.7,44.95 61.5,44.15 61.5,31.5 60.94,30.94 60.86,30.94 ; U1.3 60.86,30.94
  Bottom Layer w0.5: C19.1 C20.1 53.91,44.95 C18.1 58.49,49.21 58.17,49.53 IC5.3
+5V_CONM: C15.1 C16.1 C17.1 P1.2 U2.3 | length 73
  Top Layer w0.5: C15.1 41.21,46.99 41.7,46.5 41.7,40.8 42.3,40.2 44.1,40.2 44.7,39.6 44.7,30 45.3,29.4 52.8,29.4 53.4,28.8 53.4,24.73 54,24.13 P1.2
  Bottom Layer w0.5: U2.3 22.71,41.91 23.1,42.3 23.1,44.4 23.7,45 25.1,45 25.4,45.3 C17.1 C16.1 30.88,50.8 31.58,50.1 C15.1
+8V: C4.1 C5.1 C6.1 IC1.3 IC5.1 P2.4 | length 88.2
  Top Layer w0.5: P2.4 1.51,16.51 1.5,16.5 0.9,17.1 0.9,38.4 1.5,39 22.8,39 23.7,38.1 31.8,38.1 32.4,38.7 32.4,43.8 33.05,44.45 C5.1
  Bottom Layer w0.5: C5.1 C6.1 39.94,44.95 C4.1 44.52,48.49 45.56,49.53 ; IC1.3 45.56,49.53 ; IC5.1 45.56,49.53
+12V: C1.1 C2.1 C3.1 D2.1 D4.1 IC1.1 IC3.8 IC4.8 P2.1 U2.1 | length 103.2
  Top Layer w0.5: D2.1 30.14,35.524 D4.1 C3.1
  Bottom Layer w0.5: IC3.8 10.16,22.76 ; IC4.8 21.59,22.81 21,23.4 10.8,23.4 10.16,22.76 ; C3.1 C2.1 34.06,38.84 33.007,39.893 ; IC1.1 34.23,49.53 33.6,48.9 33.6,40.487 33.007,39.893 ; 10.16,22.76 10.16,23.4 9.43,24.13 P2.1 2.54,40.64 U2.1 3.81,40.29 4.2,39.9 4.193,39.893 C1.1 33.007,39.893
-2.5V: C27.2 C28.1 C29.1 IC7.1 P1.7 | length 38.6
  Top Layer w0.5: C28.1 43.395,18 52.8,18 53.41,17.39 53.41,12.01 52.8,11.4 ; IC7.1 48.83,12.17 49.6,11.4 52.8,11.4 ; P1.7 59.66,11.4 52.8,11.4
  Bottom Layer w0.5: C27.2 C29.1 C28.1
-8V: C12.2 C13.1 C14.1 IC2.3 IC7.3 P2.5 | length 74.8
  Top Layer w0.5: C12.2 29.585,1.81 30.176,2.4 30.176,11.576 30.9,12.3 45.3,12.3 46.2,13.2 46.2,15.9 46.94,16.64 IC7.3
  Bottom Layer w0.5: P2.5 1.37,13.97 0.9,13.5 0.9,4.5 1.59,3.81 IC2.3 4.92,2.28 5.39,1.81 C13.1 C14.1 C12.2
-12V: C7.2 C8.1 C9.1 IC2.2 IC3.5 IC4.5 P2.2 | length 72.7
  Top Layer w0.5: C7.2 12.399,23.901 12.9,23.4 17.16,23.4 17.78,22.78 IC3.5
  Bottom Layer w0.5: P2.2 4.21,21.59 4.955,20.845 ; IC2.2 7.62,5.88 7.2,6.3 5.4,6.3 4.955,6.745 4.955,20.845 ; IC3.5 17.78,20.78 17.1,20.1 ; C8.1 21.59,26.99 22.2,27.6 27.376,27.6 27.976,27 C9.1 28.6,25.4 29.21,24.79 IC4.5 29.21,20.643 28.667,20.1 17.1,20.1 ; 4.955,20.845 5.7,20.1 17.1,20.1
GND: C1.2 C2.2 C3.2 C4.2 C5.2 C6.2 C7.1 C8.2 C9.2 C12.1 C13.2 C14.2 C15.2 C16.2 C17.2 C18.2 C19.2 C20.2 C21.2 C22.2 C23.2 C24.2 C25.2 C26.2 C27.1 C28.2 C29.2 D1.2 D3.2 IC1.2 IC2.1 IC3.3 IC4.3 IC5.2 IC6.1 IC7.2 P1.1 P1.5 P1.8 P2.3 P2.6 U1.1 U2.2 U2.4 | length 350.3
  Top Layer w0.5: P2.6 4.2,11.43 4.92,12.15 4.92,15.9 ; P2.3 4.17,19.05 4.92,18.3 4.92,15.9 ; IC3.3 15.24,15.97 14.7,16.51 ; v1(16.2,30.6) 16.32,30.48 D3.2 D1.2 ; C8.2 19.8,24.65 19.8,24.3 ; C16.2 22.86,51.96 23.4,52.5 28.98,52.5 29.58,51.9 29.58,50.88 ; C9.2 25.436,23.936 24.9,23.4 20.7,23.4 19.8,24.3 ; C15.2 29.58,50.88 ; IC1.2 39.28,51.09 38.77,51.6 ; C26.2 43.18,21.305 43.175,21.3 43.695,20.78 IC6.1 ; C19.2 48.1,41.91 47.4,42.61 47.4,51 46.8,51.6 38.77,51.6 ; IC7.2 51.86,13.84 52.2,13.5 v1(52.2,12.6) ; C23.2 51.63,30.94 U1.1 54.88,27.32 55.5,26.7 59.66,26.7 P1.1 ; 4.92,15.9 5.53,16.51 14.7,16.51 ; 14.7,16.51 18.9,16.51 19.8,17.41 19.8,24.3 ; 29.58,50.88 30.3,51.6 38.77,51.6
  Bottom Layer w0.5: U2.2 U2.4 C16.2 C17.2 ; IC2.1 10.86,4.35 C13.2 C14.2 ; IC3.3 15.24,15.84 15.9,16.5 18.9,16.5 ; v1(16.2,30.6) 15,30.6 14.399,29.999 C7.1 C8.2 ; C12.1 20.86,3.81 C14.2 ; C1.2@26.503,42.6 C1.2 28.967,42.433 29.1,42.3 29.58,42.78 C15.2 ; IC4.3 26.67,15.93 26.1,16.5 ; IC1.2 39.28,50.98 39.9,51.6 53.7,51.6 54.42,50.88 IC5.2 ; C26.2 C25.2 35.7,22.86 ; C23.2 C22.2 42.47,31.75 C21.2 37.11,32.31 36.6,31.8 ; C18.2 57.45,41.91 C20.2 C19.2 45.56,41.91 C4.2 43.48,41.91 C6.2 C5.2 36.6,40.94 C2.2 36.6,31.8 ; P1.1@59.66,26.7 P1.1 ; P1.8 52.91,8.89 52.2,9.6 v1(52.2,12.6) ; P1.5 59.68,16.5 57.9,16.5 57.3,15.9 57.3,13.2 56.7,12.6 v1(52.2,12.6) ; 18.9,16.5 26.1,16.5 ; 18.9,16.5 19.5,15.9 19.5,5.17 C14.2 ; 26.1,16.5 31.2,16.5 32.1,17.4 ; 32.1,17.4 32.1,22.8 32.7,23.4 C24.2 34.814,22.86 35.7,22.86 ; 32.1,17.4 32.1,16.5 32.82,15.78 C27.1 34.83,15.24 C29.2 C28.2 43.175,13.2 43.775,12.6 v1(52.2,12.6) ; 35.7,22.86 36.6,23.76 C3.2 36.6,31.8
  other v1: 31.8,5.1 28.5,5.152 52.549,5.4 58.49,5.4 55.396,6.3 7.038,8.1 10.16,8.1 51.3,8.544 31.8,8.7 20.86,9.595 36.9,13.8 31.8,13.81 26.111,17.7 13.706,18.3 36.378,20.4 40.8,20.4 31.904,21.59 7.2,26.021 30.3,27.81 35.1,27.9 39.605,29.7 42.678,29.7 24.13,33 12.903,36 41.7,38.597 49.78,38.648 52.366,38.648 37.727,38.7 47.175,38.7 56.16,40.2 59.7,40.2 5.7,46.482 11.015,46.482 16.035,46.482 60.876,47.7 48.806,48.3 60.902,51.3
NetC10_1: C10.1 IC3.2 | length 5.2
  Bottom Layer w0.5: IC3.2 12.7,9.66 C10.1
NetC10_2: C10.2 IC3.4 | length 6.8
  Bottom Layer w0.5: C10.2 17.01,8.89 17.78,9.66 IC3.4
NetC11_1: C11.1 IC4.2 | length 5.2
  Bottom Layer w0.5: IC4.2 24.13,9.66 C11.1
NetC11_2: C11.2 IC4.4 | length 7
  Bottom Layer w0.5: C11.2 28.8,8.89 29.21,9.3 IC4.4
NetD1_1: D1.1 D2.2 P3.1 | length 25.6
  Top Layer w0.5: P3.1 5.08,37.02 5.86,37.8 21.9,37.8 22.5,37.2 22.5,35.58 D1.1 D2.2
NetD3_1: D3.1 D4.2 P3.2 | length 25.8
  Top Layer w0.5: P3.2 5.08,28.82 5.7,28.2 21.92,28.2 22.52,28.8 D3.1 D4.2
pads on no net: IC3.1 IC3.6 IC3.7 IC4.1 IC4.6 IC4.7 IC6.4 U1.4

## Polygon pours and split planes (outlines as drawn)
GND on Top Layer "PLANO_TOP" (solid, remove dead copper, pour order 0): 0,52.07 1.27,53.34 60.96,53.34 62.23,52.07 62.23,1.27 60.96,0 1.27,0 0,1.27
GND on Bottom Layer "PLANO_BOTTOM" (solid, pour order 4): 0,52.07 1.27,53.34 60.96,53.34 62.23,52.07 62.23,1.27 60.96,0 1.27,0 0,1.27

## Silkscreen, mask and mechanical layers (free items; w line width, h text height)
Top Overlay:
  drawing of 10 lines, arcs and shapes, not listed
  text "+12V" at 10.795,33.7 h2.5
  text "GND" at 10.995,31.1 h2.5
  text "GND" at 54.147,26.152 h2.2
  text "+12V" at 4.6,23.5 h2.2
  text "+5V SW" at 52.007,23.5 h2.2
  text "-12V" at 4.6,21 h2.2
  text "+5V" at 54.876,21 h2.2
  text "+3.3V" at 53.482,18.429 h2.2
  text "GND" at 4.8,18.4 h2.2
  text "GND" at 54.147,16 h2.2
  text "+8V" at 4.6,15.9 h2.2
  text "-8V" at 4.6,13.4 h2.2
  text "+2.5V" at 53.482,13.4 h2.2
  text "GND" at 4.8,10.845 h2.2
  text "-2.5V" at 53.836,10.835 h2.2
  text "GND" at 54.147,8.378 h2.2
  text "FUENTE DE ALIMENTACIÓN" at 31.75,1.163 h3
Mechanical 15:
  the board outline again, w0.5